# Altium PCB 直流光电.PCBDOC
Units mil, origin at the board's own origin, x right, y up, seen from the top; angles counter-clockwise.
Board outline 9840 x 5905 mil, 2 copper layers (Top Layer, Bottom Layer); 77 components, 45 nets, 215 pads, 4 vias.
Unrouted connection lines stored in the file: 1.
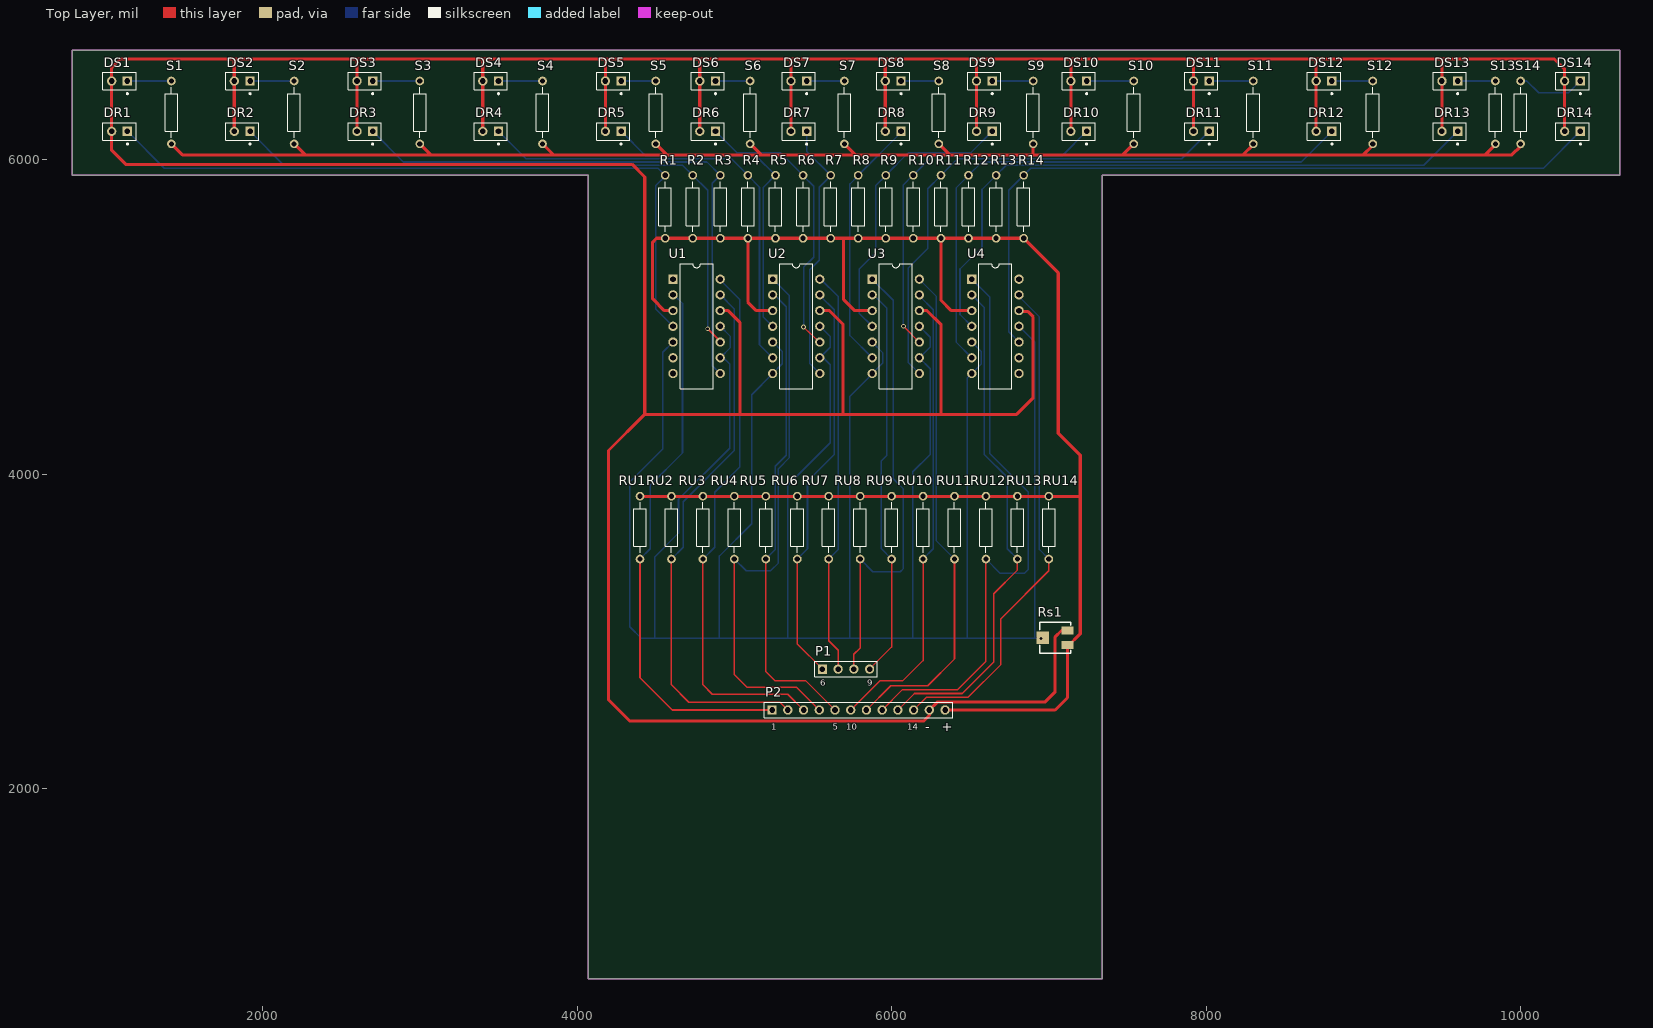
[diagram p0: Top Layer view]
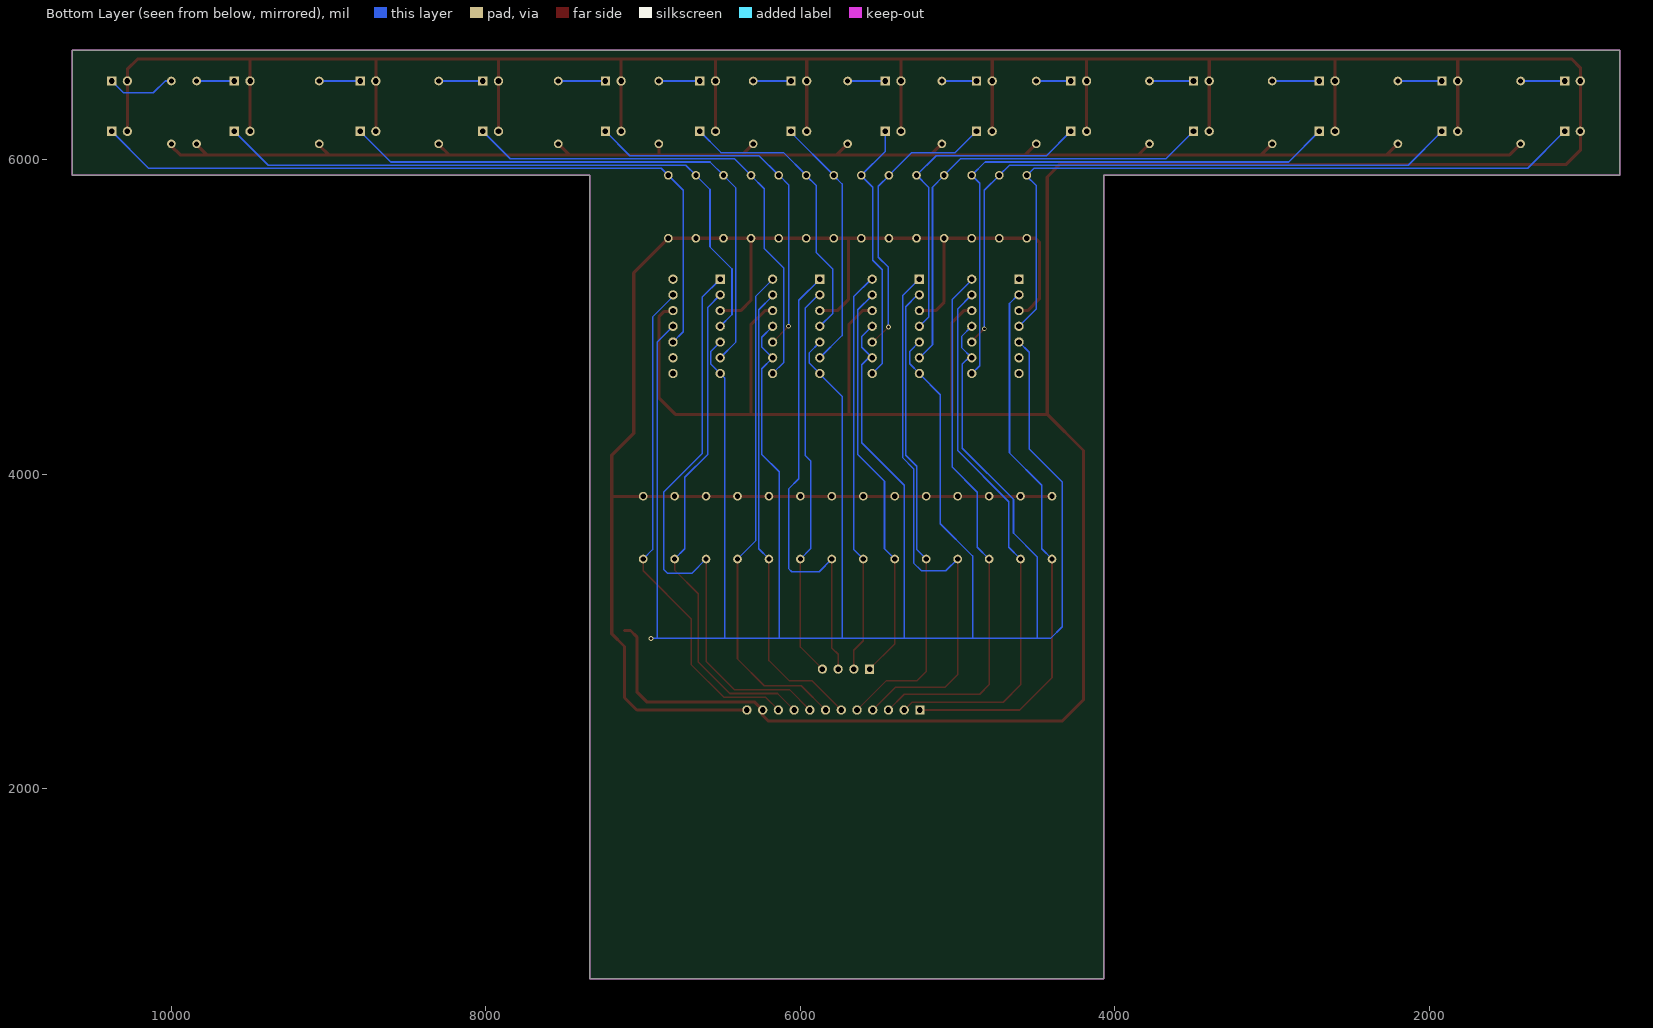
[diagram p1: Bottom Layer view, seen from below]

## Layer stack, top to bottom
Top Layer: signal copper 1.4
Dielectric: dielectric 12.6, FR-4, Dk 4.8
Bottom Layer: signal copper 1.4

## Board outline
790,6695 790,5900 4070,5900 4070,790 7340,790 7340,5900 10630,5900 10630,6695

## Design rules (kind name [scope] priority, off if disabled: settings)
Clearance [All] p1: gap=10
ComponentClearance [All] p1: gap=10 collisioncheckmode=0
PolygonConnect [All] p1: connectstyle=Relief reliefconductorwidth=10 reliefentries=4 polygonreliefangle="90 Angle"
RoutingVias [All] p1: holewidth=28 width=50 viastyle="Through Hole" minholewidth=28 minwidth=50 maxholewidth=28 maxwidth=50
SolderMaskExpansion [All] p1: expansion=4
TestPointUsage [All] p1: valid=0 allowmultiple=FALSE
Testpoint [All] p1: side=15 testpointundercomponent=TRUE minsize=40 maxsize=100 preferedsize=60 minholesize=0 maxholesize=40 preferedholesize=32 testpointgrid=1 style=1023 order=0-123456789
Width [All] p1: maxlimit=20 minlimit=10 preferedwidth=10 toplayer_prefwidth=20 minimp=50.000000 maximp=50.000000 favimp=50.000000
17 further rules are at their usual default settings.

## Components (designator, comment, footprint, x,y, rotation, side; value= is the part's Value field where it differs from the comment)
DR1 "Neon" PIN2 1140,6180 r180 top
DR2 "Neon" PIN2 1920,6180 r180 top
DR3 "Neon" PIN2 2700,6180 r180 top
DR4 "Neon" PIN2 3500,6180 r180 top
DR5 "Neon" PIN2 4280,6180 r180 top
DR6 "Neon" PIN2 4880,6180 r180 top
DR7 "Neon" PIN2 5460,6180 r180 top
DR8 "Neon" PIN2 6060,6180 r180 top
DR9 "Neon" PIN2 6640,6180 r180 top
DR10 "Neon" PIN2 7240,6180 r180 top
DR11 "Neon" PIN2 8020,6180 r180 top
DR12 "Neon" PIN2 8800,6180 r180 top
DR13 "Neon" PIN2 9600,6180 r180 top
DR14 "Neon" PIN2 10380,6180 r180 top
DS1 "Neon" PIN2 1140,6500 r180 top
DS2 "Neon" PIN2 1920,6500 r180 top
DS3 "Neon" PIN2 2700,6500 r180 top
DS4 "Neon" PIN2 3500,6500 r180 top
DS5 "Neon" PIN2 4280,6500 r180 top
DS6 "Neon" PIN2 4880,6500 r180 top
DS7 "Neon" PIN2 5460,6500 r180 top
DS8 "Neon" PIN2 6060,6500 r180 top
DS9 "Neon" PIN2 6640,6500 r180 top
DS10 "Neon" PIN2 7240,6500 r180 top
DS11 "Neon" PIN2 8020,6500 r180 top
DS12 "Neon" PIN2 8800,6500 r180 top
DS13 "Neon" PIN2 9600,6500 r180 top
DS14 "Neon" PIN2 10380,6500 r180 top
P1 "Header 4" HDR1X4 5560,2760 r0 top
P2 "Header 12" HDR1X12 5240,2500 r0 top
R1 "Res2" AXIAL-0.4 4560,5700 r270 top
R2 "Res2" AXIAL-0.4 4735.38,5700 r270 top
R3 "Res2" AXIAL-0.4 4910.77,5700 r270 top
R4 "Res2" AXIAL-0.4 5086.15,5700 r270 top
R5 "Res2" AXIAL-0.4 5261.54,5700 r270 top
R6 "Res2" AXIAL-0.4 5436.92,5700 r270 top
R7 "Res2" AXIAL-0.4 5612.31,5700 r270 top
R8 "Res2" AXIAL-0.4 5787.69,5700 r270 top
R9 "Res2" AXIAL-0.4 5963.08,5700 r270 top
R10 "Res2" AXIAL-0.4 6138.46,5700 r270 top
R11 "Res2" AXIAL-0.4 6313.85,5700 r270 top
R12 "Res2" AXIAL-0.4 6489.23,5700 r270 top
R13 "Res2" AXIAL-0.4 6664.62,5700 r270 top
R14 "Res2" AXIAL-0.4 6840,5700 r270 top
Rs1 "RPot SM" POT4MM-2 7040,2960 r180 top
RU1 "Res2" AXIAL-0.4 4400,3660 r270 top
RU2 "Res2" AXIAL-0.4 4600,3660 r270 top
RU3 "Res2" AXIAL-0.4 4800,3660 r270 top
RU4 "Res2" AXIAL-0.4 5000,3660 r270 top
RU5 "Res2" AXIAL-0.4 5200,3660 r270 top
RU6 "Res2" AXIAL-0.4 5400,3660 r270 top
RU7 "Res2" AXIAL-0.4 5600,3660 r270 top
RU8 "Res2" AXIAL-0.4 5800,3660 r270 top
RU9 "Res2" AXIAL-0.4 6000,3660 r270 top
RU10 "Res2" AXIAL-0.4 6200,3660 r270 top
RU11 "Res2" AXIAL-0.4 6400,3660 r270 top
RU12 "Res2" AXIAL-0.4 6600,3660 r270 top
RU13 "Res2" AXIAL-0.4 6800,3660 r270 top
RU14 "Res2" AXIAL-0.4 7000,3660 r270 top
S1 "Res2" AXIAL-0.4 1420,6300 r270 top
S2 "Res2" AXIAL-0.4 2200,6300 r270 top
S3 "Res2" AXIAL-0.4 3000,6300 r270 top
S4 "Res2" AXIAL-0.4 3780,6300 r270 top
S5 "Res2" AXIAL-0.4 4500,6300 r270 top
S6 "Res2" AXIAL-0.4 5100,6300 r270 top
S7 "Res2" AXIAL-0.4 5700,6300 r270 top
S8 "Res2" AXIAL-0.4 6300,6300 r270 top
S9 "Res2" AXIAL-0.4 6900,6300 r270 top
S10 "Res2" AXIAL-0.4 7540,6300 r270 top
S11 "Res2" AXIAL-0.4 8300,6300 r270 top
S12 "Res2" AXIAL-0.4 9060,6300 r270 top
S13 "Res2" AXIAL-0.4 9840,6300 r270 top
S14 "Res2" AXIAL-0.4 10000,6300 r270 top
U1 "LM239AN" DIP14 4760,4940 r270 top
U2 "LM239AN" DIP14 5393.33,4940 r270 top
U3 "LM239AN" DIP14 6026.67,4940 r270 top
U4 "LM239AN" DIP14 6660,4940 r270 top

## Footprints (in the part's own frame and the unit in brackets; to place one, negate y for a bottom-side part, rotate by r counter-clockwise, add the part's x,y. Pads: shape width x height; smd on the part's side, far side on the other; paste and mask are expansions set on the pad)
AXIAL-0.4 [mm] "Resistor; 2 Leads"
  round 1.4 hole 0.85: 1(-5.08,0) 2(5.08,0)
  silkscreen extent -4.06,-1.02 4.06,1.02
DIP14 [mm] "DIP; 14 Leads; Row Spacing 7.62 mm; Pitch 2.54 mm"
  rect 1.5x1.5 hole 0.9: 1(-7.62,-3.81)
  round 1.5 hole 0.9: 2(-5.08,-3.81) 3(-2.54,-3.81) 4(0,-3.81) 5(2.54,-3.81) 6(5.08,-3.81) 7(7.62,-3.81) 8(7.62,3.81) 9(5.08,3.81) 10(2.54,3.81) 11(0,3.81) 12(-2.54,3.81) 13(-5.08,3.81) 14(-7.62,3.81)
  silkscreen extent -10.1,-2.65 10.1,2.65
HDR1X4 [mm] "Connector; Header; 4 Position"
  rect 1.5x1.5 hole 0.9: 1(0,0)
  round 1.5 hole 0.9: 2(2.54,0) 3(5.08,0) 4(7.62,0)
  silkscreen extent -1.27,-1.27 8.89,1.27
HDR1X12 [mm] "Connector; Header; 12 Position"
  rect 1.5x1.5 hole 0.9: 1(0,0)
  round 1.5 hole 0.9: 2(2.54,0) 3(5.08,0) 4(7.62,0) 5(10.16,0) 6(12.7,0) 7(15.24,0) 8(17.78,0) 9(20.32,0) 10(22.86,0) 11(25.4,0) 12(27.94,0)
  silkscreen extent -1.27,-1.27 29.21,1.27
PIN2 [mm] "Photosensitive Diode; 2 Leads"
  rect 1.5x1.5 hole 0.9: 1(0,0)
  round 1.5 hole 0.9: 2(2.54,0)
  silkscreen extent -1.4,-1.4 3.94,2.17
POT4MM-2 [mm] "Square Trimming Potentiometer"
  rect 2x1.3 smd: CCW(-2,-1.15) CW(-2,1.15)
  rect 2x2 smd: W(2,0)
  silkscreen extent -2.5,-2.5 2.5,2.5

## Part data
DR1 DR2 DR3 DR4 DR5 DR6 DR7 DR8 DR9 DR10 DR11 DR12 DR13 DR14 DS1 DS2 DS3 DS4 DS5 DS6 DS7 DS8 DS9 DS10 DS11 DS12 DS13 DS14: "Neon Bulb"
P1: "Header, 4-Pin"
P2: "Header, 12-Pin"
R1 R2 R3 R4 R5 R6 R7 R8 R9 R10 R11 R12 R13 R14 RU1 RU2 RU3 RU4 RU5 RU6 RU7 RU8 RU9 RU10 RU11 RU12 RU13 RU14 S1 S2 S3 S4 S5 S6 S7 S8 S9 S10 S11 S12 S13 S14: "Resistor"
Rs1: "Square Trimming Potentiometer"
U1 U2 U3 U4: "Low-Power Quad Voltage Comparator"

## Via types
v1: diameter 30, hole 18, Top Layer to Bottom Layer, 4 vias

## Nets (pads, with @x,y where several pads share a name; then routed paths per layer and width w, separated by ;. In a path a pad name is that pad's centre, name@x,y a point inside that pad or via, vN(x,y) a via of type N, cw(c..) or ccw(c..) an arc to the next point about the centre after c; other vN are vias at no path point)
GND: DR1.2 DR2.2 DR3.2 DR4.2 DR5.2 DR6.2 DR7.2 DR8.2 DR9.2 DR10.2 DR11.2 DR12.2 DR13.2 DR14.2 DS1.2 DS2.2 DS3.2 DS4.2 DS5.2 DS6.2 DS7.2 DS8.2 DS9.2 DS10.2 DS11.2 DS12.2 DS13.2 DS14.2 P2.11 Rs1.CCW U1.12 U2.12 U3.12 U4.12 | length 31427.5
  Top Layer w20: DR2.2 1820,6640 ; DR3.2 2600,6640 ; DR4.2 3400,6640 ; DR5.2 4180,6640 ; DR6.2 4780,6640 ; U1.12 4960,5040 5035,4965 5035,4380 ; DR7.2 5360,6640 ; U2.12 5605,5040 5690,4955 5690,4380 ; DR8.2 5960,6640 ; U3.12 6225,5040 6315,4950 6315,4380 ; DR9.2 6540,6640 ; U4.12 6815,5035 6865,5035 6900,5000 6900,4485 6795,4380 4430,4380 ; Rs1.CCW 7080.28,3005.28 7040,2965 7040,2615 6975,2550 6290,2550 P2.11 6240,2465 6205,2430 4335,2430 4200,2565 4200,4150 4430,4380 ; DR10.2 7140,6640 ; DR11.2 7920,6640 ; DR12.2 8700,6640 ; DR13.2 9500,6640 ; DR14.2 10280,6575 10215,6640 1095,6640 1040,6585 1040,6060 1130,5970 4350,5970 4430,5890 4430,4380
NetDS1_1: DS1.1 S1.1 | length 280
  Bottom Layer w10: DS1.1 S1.1
NetDS2_1: DS2.1 S2.1 | length 280
  Bottom Layer w10: DS2.1 S2.1
NetDS3_1: DS3.1 S3.1 | length 300
  Bottom Layer w10: DS3.1 S3.1
NetDS4_1: DS4.1 S4.1 | length 280
  Bottom Layer w10: DS4.1 S4.1
NetDS5_1: DS5.1 S5.1 | length 220
  Bottom Layer w10: DS5.1 S5.1
NetDS6_1: DS6.1 S6.1 | length 220
  Bottom Layer w10: DS6.1 S6.1
NetDS7_1: DS7.1 S7.1 | length 240
  Bottom Layer w10: DS7.1 S7.1
NetDS8_1: DS8.1 S8.1 | length 240
  Bottom Layer w10: DS8.1 S8.1
NetDS9_1: DS9.1 S9.1 | length 260
  Bottom Layer w10: DS9.1 S9.1
NetDS10_1: DS10.1 S10.1 | length 300
  Bottom Layer w10: DS10.1 S10.1
NetDS11_1: DS11.1 S11.1 | length 280
  Bottom Layer w10: DS11.1 S11.1
NetDS12_1: DS12.1 S12.1 | length 260
  Bottom Layer w10: DS12.1 S12.1
NetDS13_1: DS13.1 S13.1 | length 240
  Bottom Layer w10: DS13.1 S13.1
NetDS14_1: DS14.1 S14.1 | length 442.1
  Bottom Layer w10: S14.1 10040,6500 10115,6425 10305,6425 DS14.1
VB1: P2.1 RU1.2 U1.2 | length 3499.5
  Top Layer w10: RU1.2 4400,2705 4605,2500 P2.1
  Bottom Layer w10: RU1.2 4465,3525 4465,3930 4670,4135 4670,5085 4615,5140 U1.2
VB2: P2.2 RU2.2 U1.13 | length 3489.2
  Top Layer w10: RU2.2 4600,2660 4710,2550 5290,2550 P2.2
  Bottom Layer w10: RU2.2 4675,3535 4675,3825 5000,4150 5000,5050 U1.13
VB3: P2.3 RU3.2 U1.14 | length 3435.4
  Top Layer w10: RU3.2 4800,2660 4860,2600 5340,2600 P2.3
  Bottom Layer w10: RU3.2 4875,3535 4875,3885 5035,4045 5035,5110 4910,5235 U1.14
VB4: P2.4 RU4.2 U2.1 | length 3579.1
  Top Layer w10: RU4.2 5000,2725 5080,2645 5395,2645 P2.4
  Bottom Layer w10: RU4.2 5075,3385 5230,3385 5280,3435 5280,4035 5350,4105 5350,5135 5245,5240 U2.1
VB5: P2.5 RU5.2 U2.2 | length 3033.1
  Top Layer w10: RU5.2 5200,2745 5260,2685 5455,2685 P2.5
  Bottom Layer w10: RU5.2 5260,3520 5260,4050 5330,4120 5330,5065 5255,5140 U2.2
VB6: P1.1 RU6.2 U2.13 | length 2581.6
  Top Layer w10: RU6.2 5400,2920 P1.1
  Bottom Layer w10: RU6.2 5465,3525 5465,3955 5635,4125 5635,5045 5543.33,5136.67 U2.13
VB7: P1.2 RU7.2 U2.14 | length 2581.9
  Top Layer w10: RU7.2 5600,2940 5660,2880 P1.2
  Bottom Layer w10: U2.14 5550,5240 5660,5130 5660,3520 RU7.2
VB8: P1.3 RU8.2 U3.1 | length 2955.1
  Top Layer w10: P1.3 5760,2855 5800,2895 RU8.2
  Bottom Layer w10: RU8.2 5880,3380 6055,3380 6075,3400 6075,3905 6010,3970 6010,5105 5876.67,5238.33 U3.1
VB9: P1.4 RU9.2 U3.2 | length 2523
  Top Layer w10: P1.4 6000,2900 RU9.2
  Bottom Layer w10: U3.2 5885,5140 5970,5055 5970,4120 5935,4085 5935,3525 RU9.2
VB10: P2.6 RU10.2 U3.13 | length 2979
  Top Layer w10: P2.6 5925,2685 6070,2685 6200,2815 RU10.2
  Bottom Layer w10: U3.13 6176.67,5133.33 6265,5045 6265,3525 RU10.2
VB11: P2.7 RU11.2 U3.14 | length 3202.1
  Top Layer w10: P2.7 5995,2655 6230,2655 6400,2825 RU11.2
  Bottom Layer w10: U3.14 6176.67,5238.33 6285,5130 6285,3575 RU11.2
VB12: P2.8 RU12.2 U4.1 | length 3750.2
  Top Layer w10: P2.8 6070,2630 6420,2630 6600,2810 RU12.2
  Bottom Layer w10: U4.1 6625,5125 6625,4130 6870,3885 6870,3395 6845,3370 6690,3370 RU12.2
VB13: P2.9 RU13.2 U4.2 | length 3253.6
  Top Layer w10: P2.9 6145,2605 6450,2605 6650,2805 6650,3240 6800,3390 RU13.2
  Bottom Layer w10: U4.2 6590,5060 6590,4125 6735,3980 6735,3525 RU13.2
VB14: P2.10 RU14.2 U4.13 | length 3230.2
  Top Layer w10: P2.10 6220,2580 6485,2580 6695,2790 6695,3080 7000,3385 RU14.2
  Bottom Layer w10: U4.13 6810,5130 6940,5000 6940,3520 RU14.2
VCC: P2.12 R1.2 R2.2 R3.2 R4.2 R5.2 R6.2 R7.2 R8.2 R9.2 R10.2 R11.2 R12.2 R13.2 R14.2 Rs1.CW RU1.1 RU2.1 RU3.1 RU4.1 RU5.1 RU6.1 RU7.1 RU8.1 RU9.1 RU10.1 RU11.1 RU12.1 RU13.1 RU14.1 S1.2 S2.2 S3.2 S4.2 S5.2 S6.2 S7.2 S8.2 S9.2 S10.2 S11.2 S12.2 S13.2 S14.2 U1.3 U2.3 U3.3 U4.3 | length 21205.4
  Top Layer w20: S1.2 1490,6030 9945,6030 10000,6085 S14.2 ; S2.2 2270,6030 ; S3.2 3070,6030 ; S4.2 3850,6030 ; RU1.1@4400,3857.4 7197.4,3857.4 ; S5.2 4570,6030 ; U1.3 4555,5040 4480,5115 4480,5475 4505,5500 R14.2 7060,5280 7060,4260 7200,4120 7200,2985 7118.74,2903.74 7118.74,2578.74 7040,2500 P2.12 ; R4.2 5086.15,5093.85 5140,5040 U2.3 ; S6.2 5170,6030 ; 5695,5500 5695,5110 5765,5040 U3.3 ; S7.2 5770,6030 ; S8.2 6370,6030 ; R11.2 6313.85,5106.15 6380,5040 U4.3 ; 6900,6030 S9.2 ; 7470,6030 S10.2 ; 8235,6030 8300,6095 S11.2 ; 9000,6030 9060,6090 S12.2 ; 9775,6030 9840,6095 S13.2
VEF: Rs1.W U1.5 U1.9 U1.11 U2.5 U2.7 U2.9 U2.11 U3.5 U3.7 U3.9 U3.11 U4.5 U4.7 U4.11 | length 19202
  Bottom Layer w10: 4495,2955 4495,3475 4645,3625 4645,3840 4970,4165 4970,4700 4930,4740 U1.9 4975,4805 4975,4875 U1.11 ; U1.5 4545,4775 4545,4160 4335,3950 4335,3030 4410,2955 v1(6950,2955) ; 4905,2955 4905,3480 5110,3685 5110,4505 5243.33,4638.33 U2.7 5305,4701.67 5305,4780 5245,4840 U2.5 ; 5340,2955 5340,3930 5610,4200 5610,4695 5565,4740 U2.9 5610,4806.67 5610,4875 5545,4940 U2.11 ; 5735,2955 5735,4495 5876.67,4636.67 U3.7 5945,4708.33 5945,4770 5876.67,4838.33 U3.5 ; 6135,2955 6135,4015 6245,4125 6245,4670 6176.67,4738.33 U3.9 6245,4808.33 6245,4870 6176.67,4938.33 U3.11 ; 6480,2955 6480,4610 U4.7 6570,4700 6570,4780 U4.5 ; U4.11 6910,4840 6910,2955
VM1: DR1.1 R1.1 U1.4 | length 4566.4
  Bottom Layer w10: DR1.1 1375,5945 4515,5945 R1.1 4560,5895 4500,5835 4500,5050 U1.4
VM2: DR2.1 R2.1 U1.10 | length 4063.7
  Top Layer w10: v1(4830,4925) 4910,4845 U1.10
  Bottom Layer w10: DR2.1 2135,5965 4670.38,5965 R2.1 4735.38,5899.62 4830,5805 v1(4830,4925)
VM3: DR3.1 R3.1 U1.8 | length 3628.9
  Bottom Layer w10: DR3.1 2895,5985 4825.77,5985 R3.1 4910,5900 4860,5850 4860,4690 U1.8
VM4: DR4.1 R4.1 U2.6 | length 2927.2
  Bottom Layer w10: DR4.1 3675,6005 4981.15,6005 R4.1 5086.15,5898.85 5160,5825 5160,4823.33 U2.6
VM5: DR5.1 R5.1 U2.4 | length 2114.3
  Bottom Layer w10: DR5.1 4435,6025 5136.54,6025 R5.1 5260,5900 5185,5825 5185,4998.33 U2.4
VM6: DR6.1 R6.1 U2.10 | length 1834.3
  Top Layer w10: v1(5440,4935) 5540,4840 U2.10
  Bottom Layer w10: DR6.1 5015,6045 5291.92,6045 R6.1 5436.92,5898.08 5505,5830 5505,5380 5440,5315 v1(5440,4935)
VM7: DR7.1 R7.1 U2.8 | length 1684.1
  Bottom Layer w10: DR7.1 5460,6052.31 R7.1 5612.31,5897.31 5540,5825 5540,5360 5480,5300 5480,4703.33 U2.8
VM8: DR8.1 R8.1 U3.6 | length 1633.3
  Bottom Layer w10: U3.6 5735,4881.67 5735,5845 5787.69,5897.69 R8.1 6060,6172.31 DR8.1
VM9: DR9.1 R9.1 U3.4 | length 1856.4
  Bottom Layer w10: U3.4 5795,5021.67 5795,5305 5900,5410 5900,5835 5963.08,5898.08 R9.1 6108.08,6045 6505,6045 DR9.1
VM10: DR10.1 R10.1 U3.10 | length 2484.2
  Top Layer w10: v1(6075,4940) U3.10@6175,4840 ; v1@6080,4935 U3.10@6175,4840 ; U3.10 U3.10@6175,4840
  Bottom Layer w10: v1(6075,4940) 6075,5840 6133.46,5898.46 6138.46,5898.46 R10.1 6263.46,6025 7085,6025 DR10.1
VM11: DR11.1 R11.1 U3.8 | length 3198.3
  Bottom Layer w10: U3.8 6105,4711.67 6105,5310 6230,5435 6230,5815 6313.85,5898.85 R11.1 6418.85,6005 7845,6005 DR11.1
VM12: DR12.1 R12.1 U4.6 | length 3661
  Bottom Layer w10: U4.6 6410,4840 6410,5820 6489.23,5899.23 R12.1 6574.23,5985 8605,5985 DR12.1
VM13: DR13.1 R13.1 U4.4 | length 4137.5
  Bottom Layer w10: U4.4 6435,5015 6435,5305 6575,5445 6575,5810 6664.62,5899.62 R13.1 6729.62,5965 9385,5965 DR13.1
VM14: DR14.1 R14.1 U4.10 | length 4782.3
  Bottom Layer w10: U4.10 6745,4905 6745,5805 R14.1 6885,5945 10145,5945 DR14.1
pads on no net: U1.1 U1.6 U1.7 U4.8 U4.9 U4.14

## Keep-outs
Keep-Out Layer:
  the board outline again, w10

## Silkscreen, mask and mechanical layers (free items; w line width, h text height)
Top Overlay:
  text "6" at 5545,2655 h40
  text "9" at 5845,2655 h40
  text "1" at 5235,2375 h40
  text "5" at 5625,2375 h40
  text "10" at 5710,2375 h40
  text "14" at 6100,2375 h40
  text "-" at 6215,2365 h60
  text "+" at 6320,2365 h60